# Altium PCB zh1.PcbDoc
Units mil, origin at the board's own origin, x right, y up, seen from the top; angles counter-clockwise.
Board outline 2690 x 1430 mil, 2 copper layers (Top Layer, Bottom Layer); 7 components, 50 nets, 144 pads, 20 vias.
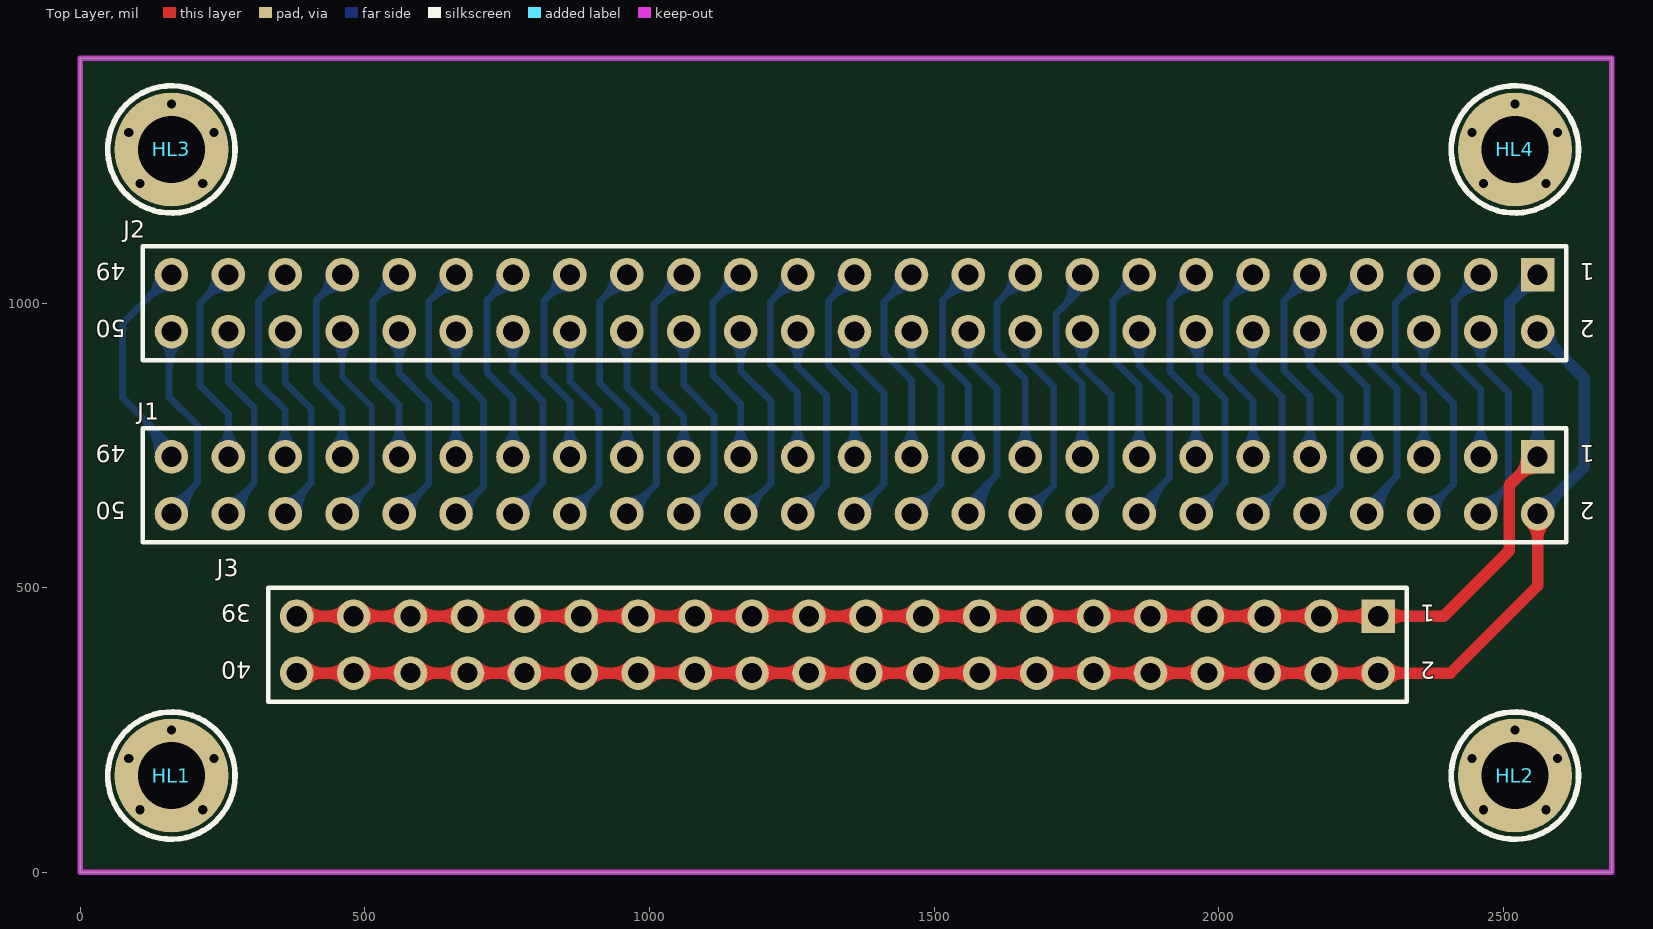
[diagram p0: Top Layer view]
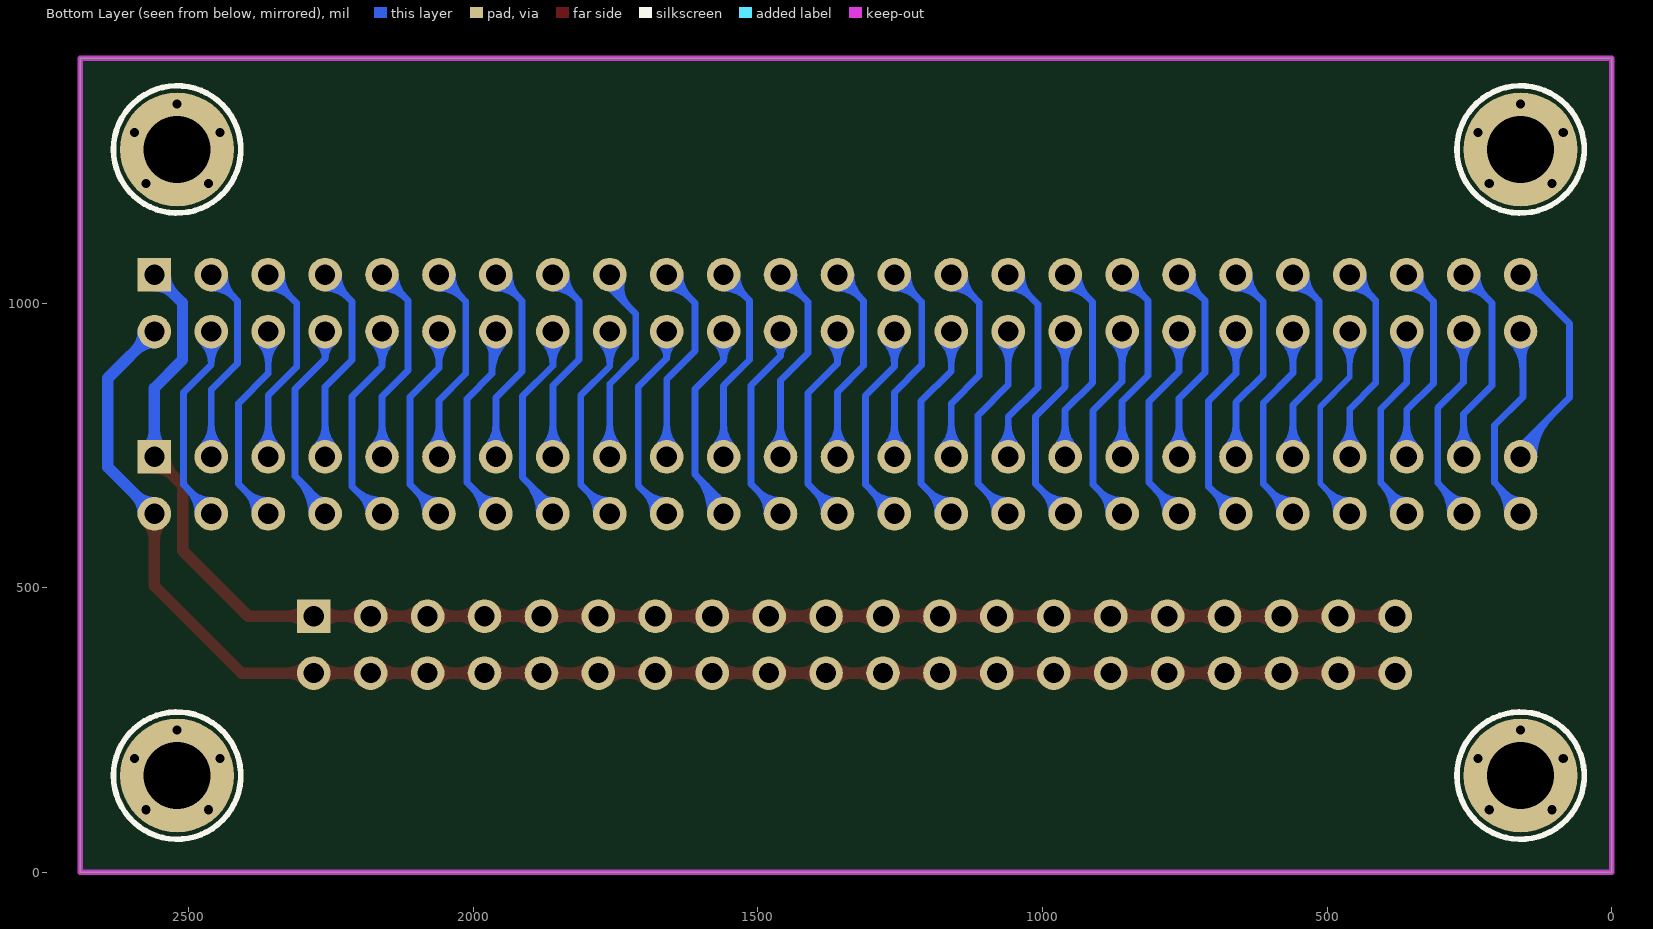
[diagram p1: Bottom Layer view, seen from below]

## Layer stack, top to bottom
Top Layer: signal copper 1.4
Dielectric: dielectric 12.6, FR-4, Dk 4.8
Bottom Layer: signal copper 1.4

## Board outline
0,0 0,1430 2690,1430 2690,0

## Design rules (kind name [scope] priority, off if disabled: settings)
Clearance [All] p1: gap=10
PolygonConnect [All] p1: connectstyle=Relief reliefconductorwidth=10 reliefentries=4 polygonreliefangle="90 Angle"
RoutingVias [All] p1: holewidth=28 width=50 viastyle="Through Hole" minholewidth=28 minwidth=50 maxholewidth=28 maxwidth=50
SilkscreenOverComponentPads [All] p1: minsilkscreentomaskgap=10
SolderMaskExpansion [All] p1: expansion=4
TestPointUsage [All] p1: valid=0 allowmultiple=FALSE
Testpoint [All] p1: side=15 testpointundercomponent=TRUE minsize=40 maxsize=100 preferedsize=60 minholesize=0 maxholesize=40 preferedholesize=32 testpointgrid=1 style=1023 order=0-112345678
Width [All] p1: maxlimit=20 minlimit=10 preferedwidth=20
23 further rules are at their usual default settings.

## Components (designator, comment, footprint, x,y, rotation, side; value= is the part's Value field where it differs from the comment)
HL1 "M3" JX002-HOLE-M3 160,170 r0 top
HL2 "M3" JX002-HOLE-M3 2520,170 r0 top
HL3 "M3" JX002-HOLE-M3 160,1270 r0 top
HL4 "M3" JX002-HOLE-M3 2520,1270 r0 top
J1 "2X25/DIP2.54" J089-HDR2X25-DIP2.54MM 2560,730 r180 top
J2 "2X25/DIP2.54" J089-HDR2X25-DIP2.54MM 2560,1050 r180 top
J3 "2X20/DIP2.54" J087-HDR2X20-DIP2.54MM 2280,450 r180 top

## Footprints (in the part's own frame and the unit in brackets; to place one, negate y for a bottom-side part, rotate by r counter-clockwise, add the part's x,y. Pads: shape width x height; smd on the part's side, far side on the other; paste and mask are expansions set on the pad)
J087-HDR2X20-DIP2.54MM [mm] "Connector; Header; 20x2 Position"
  rect 1.5x1.5 hole 0.9: 1(0,0)
  round 1.5 hole 0.9: 2(0,2.54) 3(2.54,0) 4(2.54,2.54) 5(5.08,0) 6(5.08,2.54) 7(7.62,0) 8(7.62,2.54) 9(10.16,0) 10(10.16,2.54) 11(12.7,0) 12(12.7,2.54) 13(15.24,0) 14(15.24,2.54) 15(17.78,0) 16(17.78,2.54) 17(20.32,0) 18(20.32,2.54) 19(22.86,0) 20(22.86,2.54) 21(25.4,0) 22(25.4,2.54) 23(27.94,0) 24(27.94,2.54) 25(30.48,0) 26(30.48,2.54) 27(33.02,0) 28(33.02,2.54) 29(35.56,0) 30(35.56,2.54) 31(38.1,0) 32(38.1,2.54) 33(40.64,0) 34(40.64,2.54) 35(43.18,0) 36(43.18,2.54) 37(45.72,0) 38(45.72,2.54) 39(48.26,0) 40(48.26,2.54)
  silkscreen extent -1.27,-1.27 49.53,3.81, body extent 1.27,-1.27 52.07,3.81, height 8.5
J089-HDR2X25-DIP2.54MM [mm] "Connector; Header; 25x2 Position"
  rect 1.5x1.5 hole 0.9: 1(0,0)
  round 1.5 hole 0.9: 2(0,2.54) 3(2.54,0) 4(2.54,2.54) 5(5.08,0) 6(5.08,2.54) 7(7.62,0) 8(7.62,2.54) 9(10.16,0) 10(10.16,2.54) 11(12.7,0) 12(12.7,2.54) 13(15.24,0) 14(15.24,2.54) 15(17.78,0) 16(17.78,2.54) 17(20.32,0) 18(20.32,2.54) 19(22.86,0) 20(22.86,2.54) 21(25.4,0) 22(25.4,2.54) 23(27.94,0) 24(27.94,2.54) 25(30.48,0) 26(30.48,2.54) 27(33.02,0) 28(33.02,2.54) 29(35.56,0) 30(35.56,2.54) 31(38.1,0) 32(38.1,2.54) 33(40.64,0) 34(40.64,2.54) 35(43.18,0) 36(43.18,2.54) 37(45.72,0) 38(45.72,2.54) 39(48.26,0) 40(48.26,2.54) 41(50.8,0) 42(50.8,2.54) 43(53.34,0) 44(53.34,2.54) 45(55.88,0) 46(55.88,2.54) 47(58.42,0) 48(58.42,2.54) 49(60.96,0) 50(60.96,2.54)
  silkscreen extent -1.27,-1.27 62.23,3.81
JX002-HOLE-M3 [mm] "安装孔"
  round 5.08 hole 3: 0(0,0)
  silkscreen extent -2.84,-2.84 2.84,2.84

## Part data
HL1 HL2 HL3 HL4: library part JX002-HOLE-M3, "安装孔"
J1 J2: library part J089-HDR2X25-2.54mm-DIP, "双排直针"
J3: library part J087-HDR2X20-2.54mm-DIP, "双排直针"

## Via types
v1: diameter 25, hole 16, Top Layer to Bottom Layer, 20 vias

## Nets (pads, with @x,y where several pads share a name; then routed paths per layer and width w, separated by ;. In a path a pad name is that pad's centre, name@x,y a point inside that pad or via, vN(x,y) a via of type N, cw(c..) or ccw(c..) an arc to the next point about the centre after c; other vN are vias at no path point)
3: J1.3 J2.3 | length 536.6
  Bottom Layer w12: J2.3@2436.47,1050 cw(c2379.67,1050) 2419.84,1009.84 cw(c2460,969.67) J2.3@2460,1026.47 ; J1.3@2443.36,746.64 ccw(c2403.2,786.8) 2460,786.8 ccw(c2516.8,786.8) J1.3@2476.64,746.64 ; J1.3 2460,848 2414,894 2414,1004 J2.3
4: J1.4 J2.4 | length 564.7
  Bottom Layer w12: J2.4@2443.36,933.36 cw(c2403.2,893.2) 2460,893.2 cw(c2516.8,893.2) J2.4@2476.64,933.36 ; J1.4 2460,632 2509,681 2509,843 2460,892 J2.4 ; J1.4@2460,653.53 ccw(c2460,705.5) 2496.75,668.75 ; J1.4@2471.53,630 cw(c2504.19,630) 2481.09,653.09 ; J1.4@2483.53,630 cw(c2545.16,630) 2501.58,673.58
5: J1.5 J2.5 | length 539.9
  Bottom Layer w12: J2.5@2336.47,1050 cw(c2279.67,1050) 2319.84,1009.84 cw(c2360,969.67) J2.5@2360,1026.47 ; J1.5@2343.36,746.64 ccw(c2303.2,786.8) 2360,786.8 ccw(c2416.8,786.8) J1.5@2376.64,746.64 ; J1.5 2360,838 2310,888 2310,1000 J2.5
6: J1.6 J2.6 | length 541.5
  Bottom Layer w12: J2.6@2343.36,933.36 cw(c2303.2,893.2) 2360,893.2 cw(c2416.8,893.2) J2.6@2376.64,933.36 ; J1.6 2412,682 2412,824 2360,876 J2.6 ; J1.6@2360,653.53 ccw(c2360,710.33) 2400.16,670.16 ccw(c2440.33,630) J1.6@2383.53,630
7: J1.7 J2.7 | length 537.4
  Bottom Layer w12: J2.7@2236.47,1050 cw(c2179.67,1050) 2219.84,1009.84 cw(c2260,969.67) J2.7@2260,1026.47 ; J1.7@2243.36,746.64 ccw(c2203.2,786.8) 2260,786.8 ccw(c2316.8,786.8) J1.7@2276.64,746.64 ; J1.7 2260,853 2213,900 2213,1003 J2.7
8: J1.8 J2.8 | length 567.4
  Bottom Layer w12: J2.8@2245.59,931.4 cw(c2222.8,902) 2260,902 ; J1.8 2260,643 2313,696 2313,849 2260,902 ; J1.8@2260,653.53 ccw(c2260,678.94) 2277.97,660.97 ; J2.8 2260,902 ; J1.8@2271.53,630 cw(c2330.74,630) 2288.87,671.87 ; J2.8@2274.41,931.4 ccw(c2297.2,902) 2260,902 ; J1.8@2283.53,630 cw(c2371.71,630) 2309.36,692.36
9: J1.9 J2.9 | length 536.2
  Bottom Layer w12: J2.9@2136.47,1050 cw(c2079.67,1050) 2119.84,1009.84 cw(c2160,969.67) J2.9@2160,1026.47 ; J1.9@2143.36,746.64 ccw(c2103.2,786.8) 2160,786.8 ccw(c2216.8,786.8) J1.9@2176.64,746.64 ; J1.9 2160,836 2114.47,881.53 2114.47,1004.47 J2.9
10: J1.10 J2.10 | length 576.6
  Bottom Layer w12: J2.10@2143.36,933.36 cw(c2103.2,893.2) 2160,893.2 cw(c2216.8,893.2) J2.10@2176.64,933.36 ; J1.10 2165,630 2213,678 2213,836 2160,889 J2.10 ; J1.10@2160,641.53 ccw(c2160,681.43) 2188.21,653.21 ; J1.10@2160,653.53 ccw(c2160,722.4) 2208.7,673.7 ; J1.10@2183.53,630 cw(c2228.26,630) 2196.63,661.63
11: J1.11 J2.11 | length 537.4
  Bottom Layer w12: J2.11@2036.47,1050 cw(c1979.67,1050) 2019.84,1009.84 cw(c2060,969.67) J2.11@2060,1026.47 ; J1.11@2043.36,746.64 ccw(c2003.2,786.8) 2060,786.8 ccw(c2116.8,786.8) J1.11@2076.64,746.64 ; J1.11 2060,829 2013,876 2013,1003 J2.11
12: J1.12 J2.12 | length 540.7
  Bottom Layer w12: J2.12@2043.36,933.36 cw(c2003.2,893.2) 2060,893.2 cw(c2116.8,893.2) J2.12@2076.64,933.36 ; J1.12 2111,681 2111,835 2060,886 J2.12 ; J1.12@2060,653.53 ccw(c2060,710.33) 2100.16,670.16 ccw(c2140.33,630) J1.12@2083.53,630
13: J1.13 J2.13 | length 536.6
  Bottom Layer w12: J2.13@1936.47,1050 cw(c1879.67,1050) 1919.84,1009.84 cw(c1960,969.67) J2.13@1960,1026.47 ; J1.13@1943.36,746.64 ccw(c1903.2,786.8) 1960,786.8 ccw(c2016.8,786.8) J1.13@1976.64,746.64 ; J1.13 1960,834 1914,880 1914,1004 J2.13
14: J1.14 J2.14 | length 610.8
  Bottom Layer w12: J2.14@1943.36,933.36 cw(c1886.3,876.3) 1967,876.3 ; J2.14@1951.85,941.85 cw(c1915.27,905.27) 1967,905.27 ; J1.14 1960,634 2011,685 2011,832 1967,876 1967,943 J2.14 ; J1.14@1960,653.53 ccw(c1960,700.67) 1993.34,667.34 ; 1967,910.1 cw(c1999.9,910.1) J2.14@1976.64,933.36 ; J1.14@1971.53,630 cw(c2009.01,630) 1982.51,656.51 ; J1.14@1983.53,630 cw(c2049.98,630) 2002.99,676.99
15: J1.15 J2.15 | length 536.6
  Bottom Layer w12: J2.15@1836.47,1050 cw(c1779.67,1050) 1819.84,1009.84 cw(c1860,969.67) J2.15@1860,1026.47 ; J1.15@1843.36,746.64 ccw(c1803.2,786.8) 1860,786.8 ccw(c1916.8,786.8) J1.15@1876.64,746.64 ; J1.15 1860,855 1814,901 1814,1004 J2.15
16: J1.16 J2.16 | length 585.1
  Bottom Layer w12: J2.16@1843.36,933.36 cw(c1803.2,893.2) 1860,893.2 cw(c1916.8,893.2) J2.16@1876.64,933.36 ; J1.16 1860,641 1913,694 1913,837 1860,890 J2.16 ; J1.16@1860,653.53 ccw(c1860,683.77) 1881.39,662.39 ; J1.16@1871.53,630 cw(c1925.91,630) 1887.46,668.46 ; J1.16@1883.53,630 cw(c1966.88,630) 1907.94,688.94
17: J1.17 J2.17 | length 575.6
  Bottom Layer w12: 1725.97,992.97 ccw(c1691.71,1027.24) J2.17@1737.68,1042.56 ; 1739.7,1006.7 ccw(c1712.31,1034.1) J2.17@1749.06,1046.35 ; J1.17@1743.36,746.64 ccw(c1703.2,786.8) 1760,786.8 ccw(c1816.8,786.8) J1.17@1776.64,746.64 ; 1753.43,1020.43 ccw(c1732.9,1040.97) J2.17@1760.45,1050.15 ; J1.17 1760,857.89 1714.47,903.41 1714.47,981.47 1760,1027 J2.17
18: J1.18 J2.18 | length 540.7
  Bottom Layer w12: J2.18@1743.36,933.36 cw(c1703.2,893.2) 1760,893.2 cw(c1816.8,893.2) J2.18@1776.64,933.36 ; J1.18 1811,681 1811,838 1760,889 J2.18 ; J1.18@1760,653.53 ccw(c1760,710.33) 1800.16,670.16 ccw(c1840.33,630) J1.18@1783.53,630
19: J1.19 J2.19 | length 539.9
  Bottom Layer w12: J2.19@1636.47,1050 cw(c1579.67,1050) 1619.84,1009.84 cw(c1660,969.67) J2.19@1660,1026.47 ; J1.19@1643.36,746.64 ccw(c1603.2,786.8) 1660,786.8 ccw(c1716.8,786.8) J1.19@1676.64,746.64 ; J1.19 1660,866 1610,916 1610,1000 J2.19
20: J1.20 J2.20 | length 516
  Bottom Layer w12: J2.20@1645.9,931.16 cw(c1624.82,903) 1660,903 ; J1.20 1710,680 1710,853 1660,903 ; J1.20@1660,653.53 ccw(c1660,710.33) 1700.16,670.16 ccw(c1740.33,630) J1.20@1683.53,630 ; J2.20 1660,903 ; J2.20@1674.1,931.16 ccw(c1695.18,903) 1660,903
21: J1.21 J2.21 | length 536.2
  Bottom Layer w12: J2.21@1536.47,1050 cw(c1479.67,1050) 1519.84,1009.84 cw(c1560,969.67) J2.21@1560,1026.47 ; J1.21@1543.36,746.64 ccw(c1503.2,786.8) 1560,786.8 ccw(c1616.8,786.8) J1.21@1576.64,746.64 ; J1.21 1560,855 1514.47,900.53 1514.47,1004.47 J2.21
22: J1.22 J2.22 | length 599.6
  Bottom Layer w12: J2.22@1544.73,932.1 cw(c1516.49,899) 1560,899 ; J1.22@1559.53,629.98 cw(c1600.03,631.7) 1571.37,660.37 ; J1.22 1560,649 1610,699 ; J2.22 1560,899 ; J1.22@1571.52,630.49 cw(c1637.09,633.27) 1590.68,679.68 ; J2.22@1575.27,932.1 ccw(c1603.51,899) 1560,899 ; J1.22@1583.51,631 cw(c1674.15,634.85) 1610,699 ; 1560,899 1610,849 1610,699
23: J1.23 J2.23 | length 538.2
  Bottom Layer w12: J2.23@1436.47,1050 cw(c1379.67,1050) 1419.84,1009.84 cw(c1460,969.67) J2.23@1460,1026.47 ; J1.23@1443.36,746.64 ccw(c1403.2,786.8) 1460,786.8 ccw(c1516.8,786.8) J1.23@1476.64,746.64 ; J1.23 1460,864 1412,912 1412,1002 J2.23
24: J1.24 J2.24 | length 507.4
  Bottom Layer w12: J2.24@1447.31,930.19 cw(c1432.47,907) 1460,907 ; J1.24 1512,682 1512,855 1460,907 ; J1.24@1460,653.53 ccw(c1460,710.33) 1500.16,670.16 ccw(c1540.33,630) J1.24@1483.53,630 ; J2.24 1460,907 ; J2.24@1472.69,930.19 ccw(c1487.53,907) 1460,907
25: J1.25 J2.25 | length 536.6
  Bottom Layer w12: J2.25@1336.47,1050 cw(c1279.67,1050) 1319.84,1009.84 cw(c1360,969.67) J2.25@1360,1026.47 ; J1.25@1343.36,746.64 ccw(c1303.2,786.8) 1360,786.8 ccw(c1416.8,786.8) J1.25@1376.64,746.64 ; J1.25 1360,844 1314,890 1314,1004 J2.25
26: J1.26 J2.26 | length 539.6
  Bottom Layer w12: J2.26@1343.53,933.2 cw(c1305.13,894) 1360,894 ; J1.26 1412,682 1412,842 1360,894 ; J1.26@1360,653.53 ccw(c1360,710.33) 1400.16,670.16 ccw(c1440.33,630) J1.26@1383.53,630 ; J2.26 1360,894 ; J2.26@1376.47,933.2 ccw(c1414.87,894) 1360,894
27: J1.27 J2.27 | length 538.2
  Bottom Layer w12: J2.27@1236.47,1050 cw(c1179.67,1050) 1219.84,1009.84 cw(c1260,969.67) J2.27@1260,1026.47 ; J1.27@1243.36,746.64 ccw(c1203.2,786.8) 1260,786.8 ccw(c1316.8,786.8) J1.27@1276.64,746.64 ; J1.27 1260,843 1212,891 1212,1002 J2.27
28: J1.28 J2.28 | length 540.7
  Bottom Layer w12: J2.28@1243.36,933.36 cw(c1203.2,893.2) 1260,893.2 cw(c1316.8,893.2) J2.28@1276.64,933.36 ; J1.28 1311,681 1311,838 1260,889 J2.28 ; J1.28@1260,653.53 ccw(c1260,710.33) 1300.16,670.16 ccw(c1340.33,630) J1.28@1283.53,630
29: J1.29 J2.29 | length 539
  Bottom Layer w12: J2.29@1136.47,1050 cw(c1079.67,1050) 1119.84,1009.84 cw(c1160,969.67) J2.29@1160,1026.47 ; J1.29@1143.36,746.64 ccw(c1103.2,786.8) 1160,786.8 ccw(c1216.8,786.8) J1.29@1176.64,746.64 ; J1.29 1160,824 1111,873 1111,1001 J2.29
30: J1.30 J2.30 | length 542.4
  Bottom Layer w12: J2.30@1143.36,933.36 cw(c1103.2,893.2) 1160,893.2 cw(c1216.8,893.2) J2.30@1176.64,933.36 ; J1.30 1213,683 1213,828 1160,881 J2.30 ; J1.30@1160,653.53 ccw(c1160,710.33) 1200.16,670.16 ccw(c1240.33,630) J1.30@1183.53,630
31: J1.31 J2.31 | length 541.5
  Bottom Layer w12: J2.31@1036.47,1050 cw(c979.67,1050) 1019.84,1009.84 cw(c1060,969.67) J2.31@1060,1026.47 ; J1.31@1043.36,746.64 ccw(c1003.2,786.8) 1060,786.8 ccw(c1116.8,786.8) J1.31@1076.64,746.64 ; J1.31 1060,800 1008,852 1008,998 J2.31
32: J1.32 J2.32 | length 542.4
  Bottom Layer w12: J2.32@1043.36,933.36 cw(c1003.2,893.2) 1060,893.2 cw(c1116.8,893.2) J2.32@1076.64,933.36 ; J1.32 1113,683 1113,803 1060,856 J2.32 ; J1.32@1060,653.53 ccw(c1060,710.33) 1100.16,670.16 ccw(c1140.33,630) J1.32@1083.53,630
33: J1.33 J2.33 | length 538.2
  Bottom Layer w12: J2.33@936.47,1050 cw(c879.67,1050) 919.84,1009.84 cw(c960,969.67) J2.33@960,1026.47 ; J1.33@943.36,746.64 ccw(c903.2,786.8) 960,786.8 ccw(c1016.8,786.8) J1.33@976.64,746.64 ; J1.33 960,812 912,860 912,1002 J2.33
34: J1.34 J2.34 | length 541.5
  Bottom Layer w12: J2.34@943.36,933.36 cw(c903.2,893.2) 960,893.2 cw(c1016.8,893.2) J2.34@976.64,933.36 ; J1.34 1012,682 1012,801 960,853 J2.34 ; J1.34@960,653.53 ccw(c960,710.33) 1000.16,670.16 ccw(c1040.33,630) J1.34@983.53,630
35: J1.35 J2.35 | length 536.2
  Bottom Layer w12: J2.35@836.47,1050 cw(c779.67,1050) 819.84,1009.84 cw(c860,969.67) J2.35@860,1026.47 ; J1.35@843.36,746.64 ccw(c803.2,786.8) 860,786.8 ccw(c916.8,786.8) J1.35@876.64,746.64 ; J1.35 860,827 814.47,872.53 814.47,1004.47 J2.35
36: J1.36 J2.36 | length 540.7
  Bottom Layer w12: J2.36@843.36,933.36 cw(c803.2,893.2) 860,893.2 cw(c916.8,893.2) J2.36@876.64,933.36 ; J1.36 911,681 911,811 860,862 J2.36 ; J1.36@860,653.53 ccw(c860,710.33) 900.16,670.16 ccw(c940.33,630) J1.36@883.53,630
37: J1.37 J2.37 | length 536.2
  Bottom Layer w12: J2.37@736.47,1050 cw(c679.67,1050) 719.84,1009.84 cw(c760,969.67) J2.37@760,1026.47 ; J1.37@743.36,746.64 ccw(c703.2,786.8) 760,786.8 ccw(c816.8,786.8) J1.37@776.64,746.64 ; J1.37 760,832.89 714.47,878.41 714.47,1004.47 J2.37
38: J1.38 J2.38 | length 568
  Bottom Layer w12: J2.38@743.36,933.36 cw(c703.2,893.2) 760,893.2 cw(c816.8,893.2) J2.38@776.64,933.36 ; J1.38 760,632 813,685 813,827 760,880 J2.38 ; J1.38@760,653.53 ccw(c760,705.5) 796.75,668.75 ; J1.38@771.53,630 cw(c804.19,630) 781.09,653.09 ; J1.38@783.53,630 cw(c845.16,630) 801.58,673.58
39: J1.39 J2.39 | length 538.2
  Bottom Layer w12: J2.39@636.47,1050 cw(c579.67,1050) 619.84,1009.84 cw(c660,969.67) J2.39@660,1026.47 ; J1.39@643.36,746.64 ccw(c603.2,786.8) 660,786.8 ccw(c716.8,786.8) J1.39@676.64,746.64 ; J1.39 660,826 612,874 612,1002 J2.39
40: J1.40 J2.40 | length 538.2
  Bottom Layer w12: J2.40@643.36,933.36 cw(c603.2,893.2) 660,893.2 cw(c716.8,893.2) J2.40@676.64,933.36 ; J1.40 708,678 708,828 660,876 J2.40 ; J1.40@660,653.53 ccw(c660,710.33) 700.16,670.16 ccw(c740.33,630) J1.40@683.53,630
41: J1.41 J2.41 | length 536.6
  Bottom Layer w12: J2.41@536.47,1050 cw(c479.67,1050) 519.84,1009.84 cw(c560,969.67) J2.41@560,1026.47 ; J1.41@543.36,746.64 ccw(c503.2,786.8) 560,786.8 ccw(c616.8,786.8) J1.41@576.64,746.64 ; J1.41 560,821 514,867 514,1004 J2.41
42: J1.42 J2.42 | length 541.5
  Bottom Layer w12: J2.42@543.36,933.36 cw(c503.2,893.2) 560,893.2 cw(c616.8,893.2) J2.42@576.64,933.36 ; J1.42 612,682 612,825 560,877 J2.42 ; J1.42@560,653.53 ccw(c560,710.33) 600.16,670.16 ccw(c640.33,630) J1.42@583.53,630
43: J1.43 J2.43 | length 536.2
  Bottom Layer w12: J2.43@436.47,1050 cw(c379.67,1050) 419.84,1009.84 cw(c460,969.67) J2.43@460,1026.47 ; J1.43@443.36,746.64 ccw(c403.2,786.8) 460,786.8 ccw(c516.8,786.8) J1.43@476.64,746.64 ; J1.43 460,814 414.47,859.53 414.47,1004.47 J2.43
44: J1.44 J2.44 | length 659.3
  Bottom Layer w10: J2.44@442.66,932.66 cw(c400.79,890.79) 460,890.79 cw(c519.21,890.79) J2.44@477.34,932.66 ; J2.44@449.73,939.73 cw(c424.93,914.93) 460,914.93 cw(c495.07,914.93) J2.44@470.27,939.73 ; J1.44 460,631 512,683 512,818 460,870 J2.44 ; J1.44@460,644.53 ccw(c460,677.19) 483.09,654.09 ; J1.44@460,654.53 ccw(c460,711.33) 500.16,671.16 ; J1.44@474.53,630 cw(c512.01,630) 485.51,656.51 ; J1.44@484.53,630 cw(c546.16,630) 502.58,673.58
45: J1.45 J2.45 | length 537.4
  Bottom Layer w12: J2.45@336.47,1050 cw(c279.67,1050) 319.84,1009.84 cw(c360,969.67) J2.45@360,1026.47 ; J1.45@343.36,746.64 ccw(c303.2,786.8) 360,786.8 ccw(c416.8,786.8) J1.45@376.64,746.64 ; J1.45 360,812 313,859 313,1003 J2.45
46: J1.46 J2.46 | length 572.6
  Bottom Layer w12: J2.46@343.36,933.36 cw(c303.2,893.2) 360,893.2 cw(c416.8,893.2) J2.46@376.64,933.36 ; J1.46 360,638.94 405.53,684.47 405.53,814.47 360,860 J2.46 ; J1.46@360,653.53 ccw(c360,688.73) 384.89,663.84 ; J1.46@371.53,630.16 cw(c419,630.8) 385.43,664.37 ; J1.46@383.53,630.32 cw(c458.65,631.34) 405.52,684.47
47: J1.47 J2.47 | length 539.9
  Bottom Layer w12: J2.47@236.47,1050 cw(c179.67,1050) 219.84,1009.84 cw(c260,969.67) J2.47@260,1026.47 ; J1.47@243.36,746.64 ccw(c203.2,786.8) 260,786.8 ccw(c316.8,786.8) J1.47@276.64,746.64 ; J1.47 260,805 210,855 210,1000 J2.47
48: J1.48 J2.48 | length 572.6
  Bottom Layer w12: J2.48@243.36,933.36 cw(c203.2,893.2) 260,893.2 cw(c316.8,893.2) J2.48@276.64,933.36 ; J1.48 260,638.94 305.53,684.47 305.53,815.47 260,861 J2.48 ; J1.48@260,653.53 ccw(c260,688.73) 284.89,663.84 ; J1.48@271.53,630.16 cw(c319,630.8) 285.43,664.37 ; J1.48@283.53,630.32 cw(c358.65,631.34) 305.52,684.47
49: J1.49 J2.49 | length 648.4
  Bottom Layer w12: 107.11,800.89 cw(c36.22,730) J1.49@136.47,730 ; 127.59,780.41 cw(c77.19,730) J1.49@148.47,730 ; J2.49@136.47,1050 cw(c79.67,1050) 119.84,1009.84 cw(c160,969.67) J2.49@160,1026.47 ; 148.08,759.92 cw(c118.16,730) J1.49@160.47,730 ; J1.49 160,748 74,834 74,964 J2.49
50: J1.50 J2.50 | length 608.5
  Bottom Layer w12: J2.50@143.36,933.36 cw(c112.86,902.86) 156,902.86 ; 156,883.54 cw(c226.46,883.54) J2.50@176.64,933.36 ; 156,912.51 cw(c197.49,912.51) J2.50@168.15,941.85 ; J1.50 160,638.94 205.53,684.47 205.53,785.47 156,835 156,946 J2.50 ; J1.50@160,653.53 ccw(c160,688.73) 184.89,663.84 ; J1.50@171.53,630.16 cw(c219,630.8) 185.43,664.37 ; J1.50@183.53,630.32 cw(c258.65,631.34) 205.52,684.47
GND: J1.2 J2.2 J3.2 J3.4 J3.6 J3.8 J3.10 J3.12 J3.14 J3.16 J3.18 J3.20 J3.22 J3.24 J3.26 J3.28 J3.30 J3.32 J3.34 J3.36 J3.38 J3.40 | length 5868.5
  Top Layer w20: J3.40 J3.38 J3.36 J3.34 J3.32 J3.30 J3.28 J3.26 J3.24 J3.22 J3.20 J3.18 J3.16 J3.14 J3.12 J3.10 J3.8 J3.6 J3.4 J3.2 2407,350 2560,503 J1.2 ; J3.40@393.81,336.19 cw(c427.14,302.86) 427.14,350 cw(c427.14,397.14) J3.40@393.81,363.81 ; J3.38@466.19,336.19 ccw(c432.86,302.86) 432.86,350 ccw(c432.86,397.14) J3.38@466.19,363.81 ; J3.38@493.81,336.19 cw(c527.14,302.86) 527.14,350 cw(c527.14,397.14) J3.38@493.81,363.81 ; J3.36@566.19,336.19 ccw(c532.86,302.86) 532.86,350 ccw(c532.86,397.14) J3.36@566.19,363.81 ; J3.36@593.81,336.19 cw(c627.14,302.86) 627.14,350 cw(c627.14,397.14) J3.36@593.81,363.81 ; J3.34@666.19,336.19 ccw(c632.86,302.86) 632.86,350 ccw(c632.86,397.14) J3.34@666.19,363.81 ; J3.34@693.81,336.19 cw(c727.14,302.86) 727.14,350 cw(c727.14,397.14) J3.34@693.81,363.81 ; J3.32@766.19,336.19 ccw(c732.86,302.86) 732.86,350 ccw(c732.86,397.14) J3.32@766.19,363.81 ; J3.32@793.81,336.19 cw(c827.14,302.86) 827.14,350 cw(c827.14,397.14) J3.32@793.81,363.81 ; J3.30@866.19,336.19 ccw(c832.86,302.86) 832.86,350 ccw(c832.86,397.14) J3.30@866.19,363.81 ; J3.30@893.81,336.19 cw(c927.14,302.86) 927.14,350 cw(c927.14,397.14) J3.30@893.81,363.81 ; J3.28@966.19,336.19 ccw(c932.86,302.86) 932.86,350 ccw(c932.86,397.14) J3.28@966.19,363.81 ; J3.28@993.81,336.19 cw(c1027.14,302.86) 1027.14,350 cw(c1027.14,397.14) J3.28@993.81,363.81 ; J3.26@1066.19,336.19 ccw(c1032.86,302.86) 1032.86,350 ccw(c1032.86,397.14) J3.26@1066.19,363.81 ; J3.26@1093.81,336.19 cw(c1127.14,302.86) 1127.14,350 cw(c1127.14,397.14) J3.26@1093.81,363.81 ; J3.24@1166.19,336.19 ccw(c1132.86,302.86) 1132.86,350 ccw(c1132.86,397.14) J3.24@1166.19,363.81 ; J3.24@1193.81,336.19 cw(c1227.14,302.86) 1227.14,350 cw(c1227.14,397.14) J3.24@1193.81,363.81 ; J3.22@1266.19,336.19 ccw(c1232.86,302.86) 1232.86,350 ccw(c1232.86,397.14) J3.22@1266.19,363.81 ; J3.22@1293.81,336.19 cw(c1327.14,302.86) 1327.14,350 cw(c1327.14,397.14) J3.22@1293.81,363.81 ; J3.20@1366.19,336.19 ccw(c1332.86,302.86) 1332.86,350 ccw(c1332.86,397.14) J3.20@1366.19,363.81 ; J3.20@1393.81,336.19 cw(c1427.14,302.86) 1427.14,350 cw(c1427.14,397.14) J3.20@1393.81,363.81 ; J3.18@1466.19,336.19 ccw(c1432.86,302.86) 1432.86,350 ccw(c1432.86,397.14) J3.18@1466.19,363.81 ; J3.18@1493.81,336.19 cw(c1527.14,302.86) 1527.14,350 cw(c1527.14,397.14) J3.18@1493.81,363.81 ; J3.16@1566.19,336.19 ccw(c1532.86,302.86) 1532.86,350 ccw(c1532.86,397.14) J3.16@1566.19,363.81 ; J3.16@1593.81,336.19 cw(c1627.14,302.86) 1627.14,350 cw(c1627.14,397.14) J3.16@1593.81,363.81 ; J3.14@1666.19,336.19 ccw(c1632.86,302.86) 1632.86,350 ccw(c1632.86,397.14) J3.14@1666.19,363.81 ; J3.14@1693.81,336.19 cw(c1727.14,302.86) 1727.14,350 cw(c1727.14,397.14) J3.14@1693.81,363.81 ; J3.12@1766.19,336.19 ccw(c1732.86,302.86) 1732.86,350 ccw(c1732.86,397.14) J3.12@1766.19,363.81 ; J3.12@1793.81,336.19 cw(c1827.14,302.86) 1827.14,350 cw(c1827.14,397.14) J3.12@1793.81,363.81 ; J3.10@1866.19,336.19 ccw(c1832.86,302.86) 1832.86,350 ccw(c1832.86,397.14) J3.10@1866.19,363.81 ; J3.10@1893.81,336.19 cw(c1927.14,302.86) 1927.14,350 cw(c1927.14,397.14) J3.10@1893.81,363.81 ; J3.8@1966.19,336.19 ccw(c1932.86,302.86) 1932.86,350 ccw(c1932.86,397.14) J3.8@1966.19,363.81 ; J3.8@1993.81,336.19 cw(c2027.14,302.86) 2027.14,350 cw(c2027.14,397.14) J3.8@1993.81,363.81 ; J3.6@2066.19,336.19 ccw(c2032.86,302.86) 2032.86,350 ccw(c2032.86,397.14) J3.6@2066.19,363.81 ; J3.6@2093.81,336.19 cw(c2127.14,302.86) 2127.14,350 cw(c2127.14,397.14) J3.6@2093.81,363.81 ; J3.4@2166.19,336.19 ccw(c2132.86,302.86) 2132.86,350 ccw(c2132.86,397.14) J3.4@2166.19,363.81 ; J3.4@2193.81,336.19 cw(c2227.14,302.86) 2227.14,350 cw(c2227.14,397.14) J3.4@2193.81,363.81 ; J3.2@2266.19,336.19 ccw(c2232.86,302.86) 2232.86,350 ccw(c2232.86,397.14) J3.2@2266.19,363.81 ; J3.2@2293.81,336.19 cw(c2327.14,302.86) 2327.14,350 cw(c2327.14,397.14) J3.2@2293.81,363.81 ; J1.2@2546.19,616.19 cw(c2512.86,582.86) 2560,582.86 cw(c2607.14,582.86) J1.2@2573.81,616.19
  Bottom Layer w20: J1.2 2642,712 2642,868 J2.2 ; J1.2@2560,649.53 ccw(c2560,696.67) 2593.34,663.34 ccw(c2626.67,630) J1.2@2579.53,630 ; J2.2@2560,930.47 cw(c2560,883.33) 2593.34,916.66 cw(c2626.67,950) J2.2@2579.53,950
VCC: J1.1 J2.1 J3.1 J3.3 J3.5 J3.7 J3.9 J3.11 J3.13 J3.15 J3.17 J3.19 J3.21 J3.23 J3.25 J3.27 J3.29 J3.31 J3.33 J3.35 J3.37 J3.39 | length 5837.6
  Top Layer w20: J3.39 J3.37 J3.35 J3.33 J3.31 J3.29 J3.27 J3.25 J3.23 J3.21 J3.19 J3.17 J3.15 J3.13 J3.11 J3.9 J3.7 J3.5 J3.3 J3.1 2395,450 2510,565 2510,680 J1.1 ; J3.39@393.81,436.19 cw(c427.14,402.86) 427.14,450 cw(c427.14,497.14) J3.39@393.81,463.81 ; J3.37@466.19,436.19 ccw(c432.86,402.86) 432.86,450 ccw(c432.86,497.14) J3.37@466.19,463.81 ; J3.37@493.81,436.19 cw(c527.14,402.86) 527.14,450 cw(c527.14,497.14) J3.37@493.81,463.81 ; J3.35@566.19,436.19 ccw(c532.86,402.86) 532.86,450 ccw(c532.86,497.14) J3.35@566.19,463.81 ; J3.35@593.81,436.19 cw(c627.14,402.86) 627.14,450 cw(c627.14,497.14) J3.35@593.81,463.81 ; J3.33@666.19,436.19 ccw(c632.86,402.86) 632.86,450 ccw(c632.86,497.14) J3.33@666.19,463.81 ; J3.33@693.81,436.19 cw(c727.14,402.86) 727.14,450 cw(c727.14,497.14) J3.33@693.81,463.81 ; J3.31@766.19,436.19 ccw(c732.86,402.86) 732.86,450 ccw(c732.86,497.14) J3.31@766.19,463.81 ; J3.31@793.81,436.19 cw(c827.14,402.86) 827.14,450 cw(c827.14,497.14) J3.31@793.81,463.81 ; J3.29@866.19,436.19 ccw(c832.86,402.86) 832.86,450 ccw(c832.86,497.14) J3.29@866.19,463.81 ; J3.29@893.81,436.19 cw(c927.14,402.86) 927.14,450 cw(c927.14,497.14) J3.29@893.81,463.81 ; J3.27@966.19,436.19 ccw(c932.86,402.86) 932.86,450 ccw(c932.86,497.14) J3.27@966.19,463.81 ; J3.27@993.81,436.19 cw(c1027.14,402.86) 1027.14,450 cw(c1027.14,497.14) J3.27@993.81,463.81 ; J3.25@1066.19,436.19 ccw(c1032.86,402.86) 1032.86,450 ccw(c1032.86,497.14) J3.25@1066.19,463.81 ; J3.25@1093.81,436.19 cw(c1127.14,402.86) 1127.14,450 cw(c1127.14,497.14) J3.25@1093.81,463.81 ; J3.23@1166.19,436.19 ccw(c1132.86,402.86) 1132.86,450 ccw(c1132.86,497.14) J3.23@1166.19,463.81 ; J3.23@1193.81,436.19 cw(c1227.14,402.86) 1227.14,450 cw(c1227.14,497.14) J3.23@1193.81,463.81 ; J3.21@1266.19,436.19 ccw(c1232.86,402.86) 1232.86,450 ccw(c1232.86,497.14) J3.21@1266.19,463.81 ; J3.21@1293.81,436.19 cw(c1327.14,402.86) 1327.14,450 cw(c1327.14,497.14) J3.21@1293.81,463.81 ; J3.19@1366.19,436.19 ccw(c1332.86,402.86) 1332.86,450 ccw(c1332.86,497.14) J3.19@1366.19,463.81 ; J3.19@1393.81,436.19 cw(c1427.14,402.86) 1427.14,450 cw(c1427.14,497.14) J3.19@1393.81,463.81 ; J3.17@1466.19,436.19 ccw(c1432.86,402.86) 1432.86,450 ccw(c1432.86,497.14) J3.17@1466.19,463.81 ; J3.17@1493.81,436.19 cw(c1527.14,402.86) 1527.14,450 cw(c1527.14,497.14) J3.17@1493.81,463.81 ; J3.15@1566.19,436.19 ccw(c1532.86,402.86) 1532.86,450 ccw(c1532.86,497.14) J3.15@1566.19,463.81 ; J3.15@1593.81,436.19 cw(c1627.14,402.86) 1627.14,450 cw(c1627.14,497.14) J3.15@1593.81,463.81 ; J3.13@1666.19,436.19 ccw(c1632.86,402.86) 1632.86,450 ccw(c1632.86,497.14) J3.13@1666.19,463.81 ; J3.13@1693.81,436.19 cw(c1727.14,402.86) 1727.14,450 cw(c1727.14,497.14) J3.13@1693.81,463.81 ; J3.11@1766.19,436.19 ccw(c1732.86,402.86) 1732.86,450 ccw(c1732.86,497.14) J3.11@1766.19,463.81 ; J3.11@1793.81,436.19 cw(c1827.14,402.86) 1827.14,450 cw(c1827.14,497.14) J3.11@1793.81,463.81 ; J3.9@1866.19,436.19 ccw(c1832.86,402.86) 1832.86,450 ccw(c1832.86,497.14) J3.9@1866.19,463.81 ; J3.9@1893.81,436.19 cw(c1927.14,402.86) 1927.14,450 cw(c1927.14,497.14) J3.9@1893.81,463.81 ; J3.7@1966.19,436.19 ccw(c1932.86,402.86) 1932.86,450 ccw(c1932.86,497.14) J3.7@1966.19,463.81 ; J3.7@1993.81,436.19 cw(c2027.14,402.86) 2027.14,450 cw(c2027.14,497.14) J3.7@1993.81,463.81 ; J3.5@2066.19,436.19 ccw(c2032.86,402.86) 2032.86,450 ccw(c2032.86,497.14) J3.5@2066.19,463.81 ; J3.5@2093.81,436.19 cw(c2127.14,402.86) 2127.14,450 cw(c2127.14,497.14) J3.5@2093.81,463.81 ; J3.3@2166.19,436.19 ccw(c2132.86,402.86) 2132.86,450 ccw(c2132.86,497.14) J3.3@2166.19,463.81 ; J3.3@2193.81,436.19 cw(c2227.14,402.86) 2227.14,450 cw(c2227.14,497.14) J3.3@2193.81,463.81 ; J3.1@2266.19,436.19 ccw(c2232.86,402.86) 2232.86,450 ccw(c2232.86,497.14) J3.1@2266.19,463.81 ; J3.1@2293.81,436.19 cw(c2327.14,402.86) 2327.14,450 cw(c2327.14,497.14) J3.1@2293.81,463.81 ; J1.1@2540.47,730 cw(c2493.33,730) 2526.66,696.66 cw(c2560,663.33) J1.1@2560,710.47
  Bottom Layer w12: J2.1@2557,1050 J2.1
  Bottom Layer w20: J2.1@2540.47,1050 cw(c2493.33,1050) 2526.66,1016.66 cw(c2560,983.33) J2.1@2560,1030.47 ; J1.1@2546.19,743.81 ccw(c2512.86,777.14) 2560,777.14 ccw(c2607.14,777.14) J1.1@2573.81,743.81 ; J1.1 2560,850.94 2510.47,900.47 2510.47,1000.47 J2.1
pads on no net: HL1.0 HL2.0 HL3.0 HL4.0
copper on no net:
  other v1: 105,110 215,110 2465,110 2575,110 85,200 235,200 2445,200 2595,200 160,250 2520,250 105,1210 215,1210 2465,1210 2575,1210 85,1300 235,1300 2445,1300 2595,1300 160,1350 2520,1350

## Keep-outs
Keep-Out Layer:
  the board outline again, w10

## Dimensions
2690,0 to 2690,1430 on Bottom Solder
0,0 to 2690,0 on Bottom Solder

## Text inside footprints (layer, text, board x,y; h text height)
J1: Top Overlay "50" at 80,650 h30 r180; Top Overlay "49" at 80,750 h30 r180; Top Overlay "1" at 2660,750 h30 r180; Top Overlay "2" at 2660,650 h30 r180
J2: Top Overlay "50" at 80,970 h30 r180; Top Overlay "49" at 80,1070 h30 r180; Top Overlay "1" at 2660,1070 h30 r180; Top Overlay "2" at 2660,970 h30 r180
J3: Top Overlay "1" at 2380,470 h30 r180; Top Overlay "2" at 2380,370 h30 r180; Top Overlay "40" at 300,370 h30 r180; Top Overlay "39" at 300,470 h30 r180